# Altium PCB Timer_pcb.PcbDoc
Units mil, origin at the board's own origin, x right, y up, seen from the top; angles counter-clockwise.
Board outline 1584.83 x 1584.83 mil, 4 copper layers (Top Layer, power, Gnd, Bottom Layer), stack 23.756 mil thick; 17 components, 13 nets, 64 pads, 0 vias.
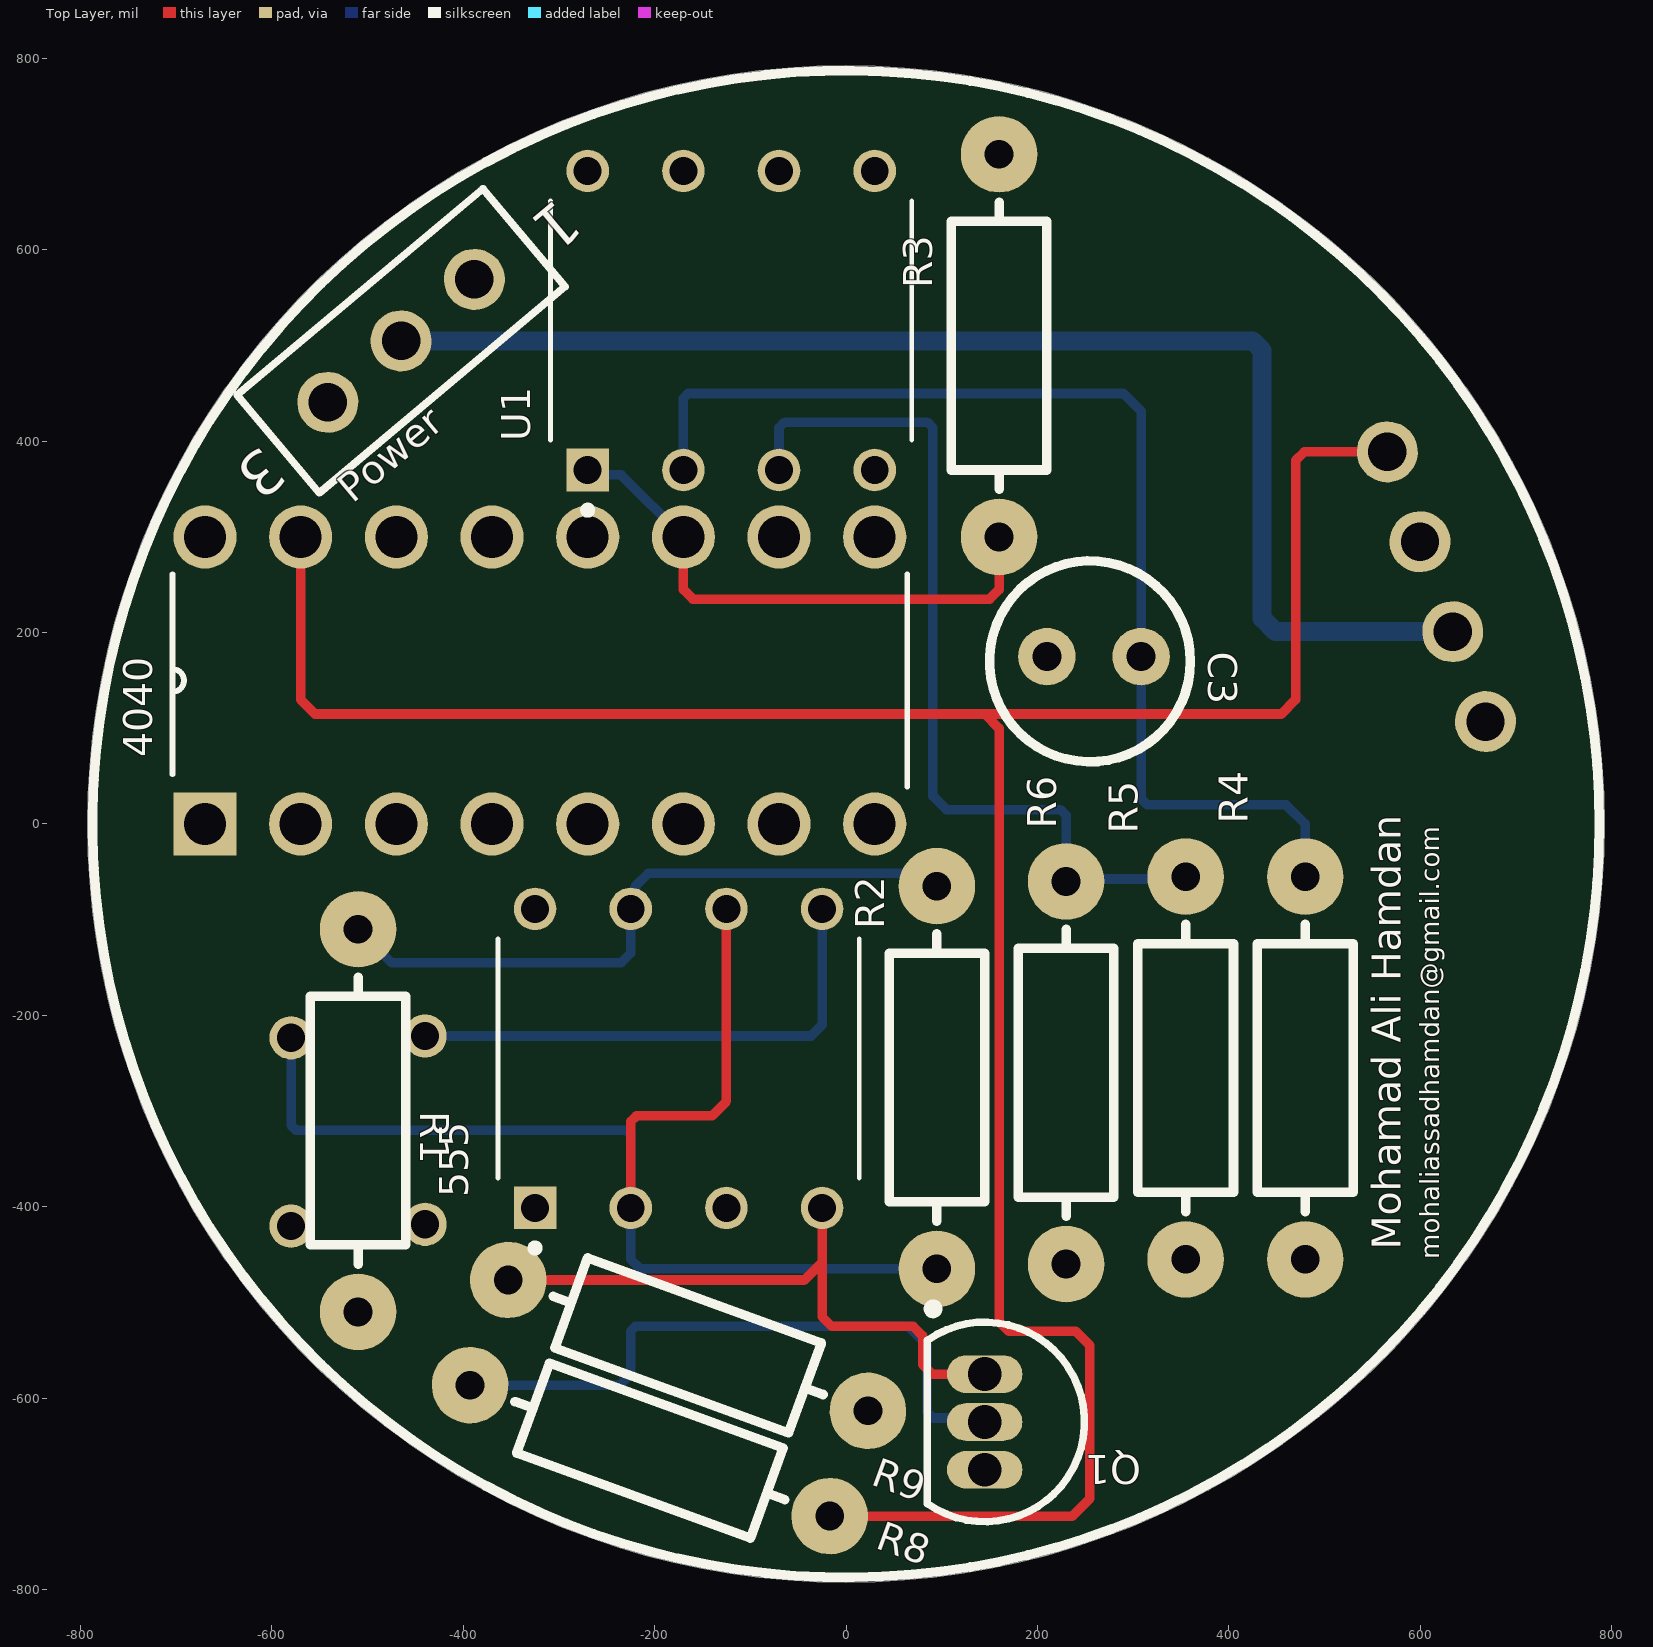
[diagram p0: Top Layer view]
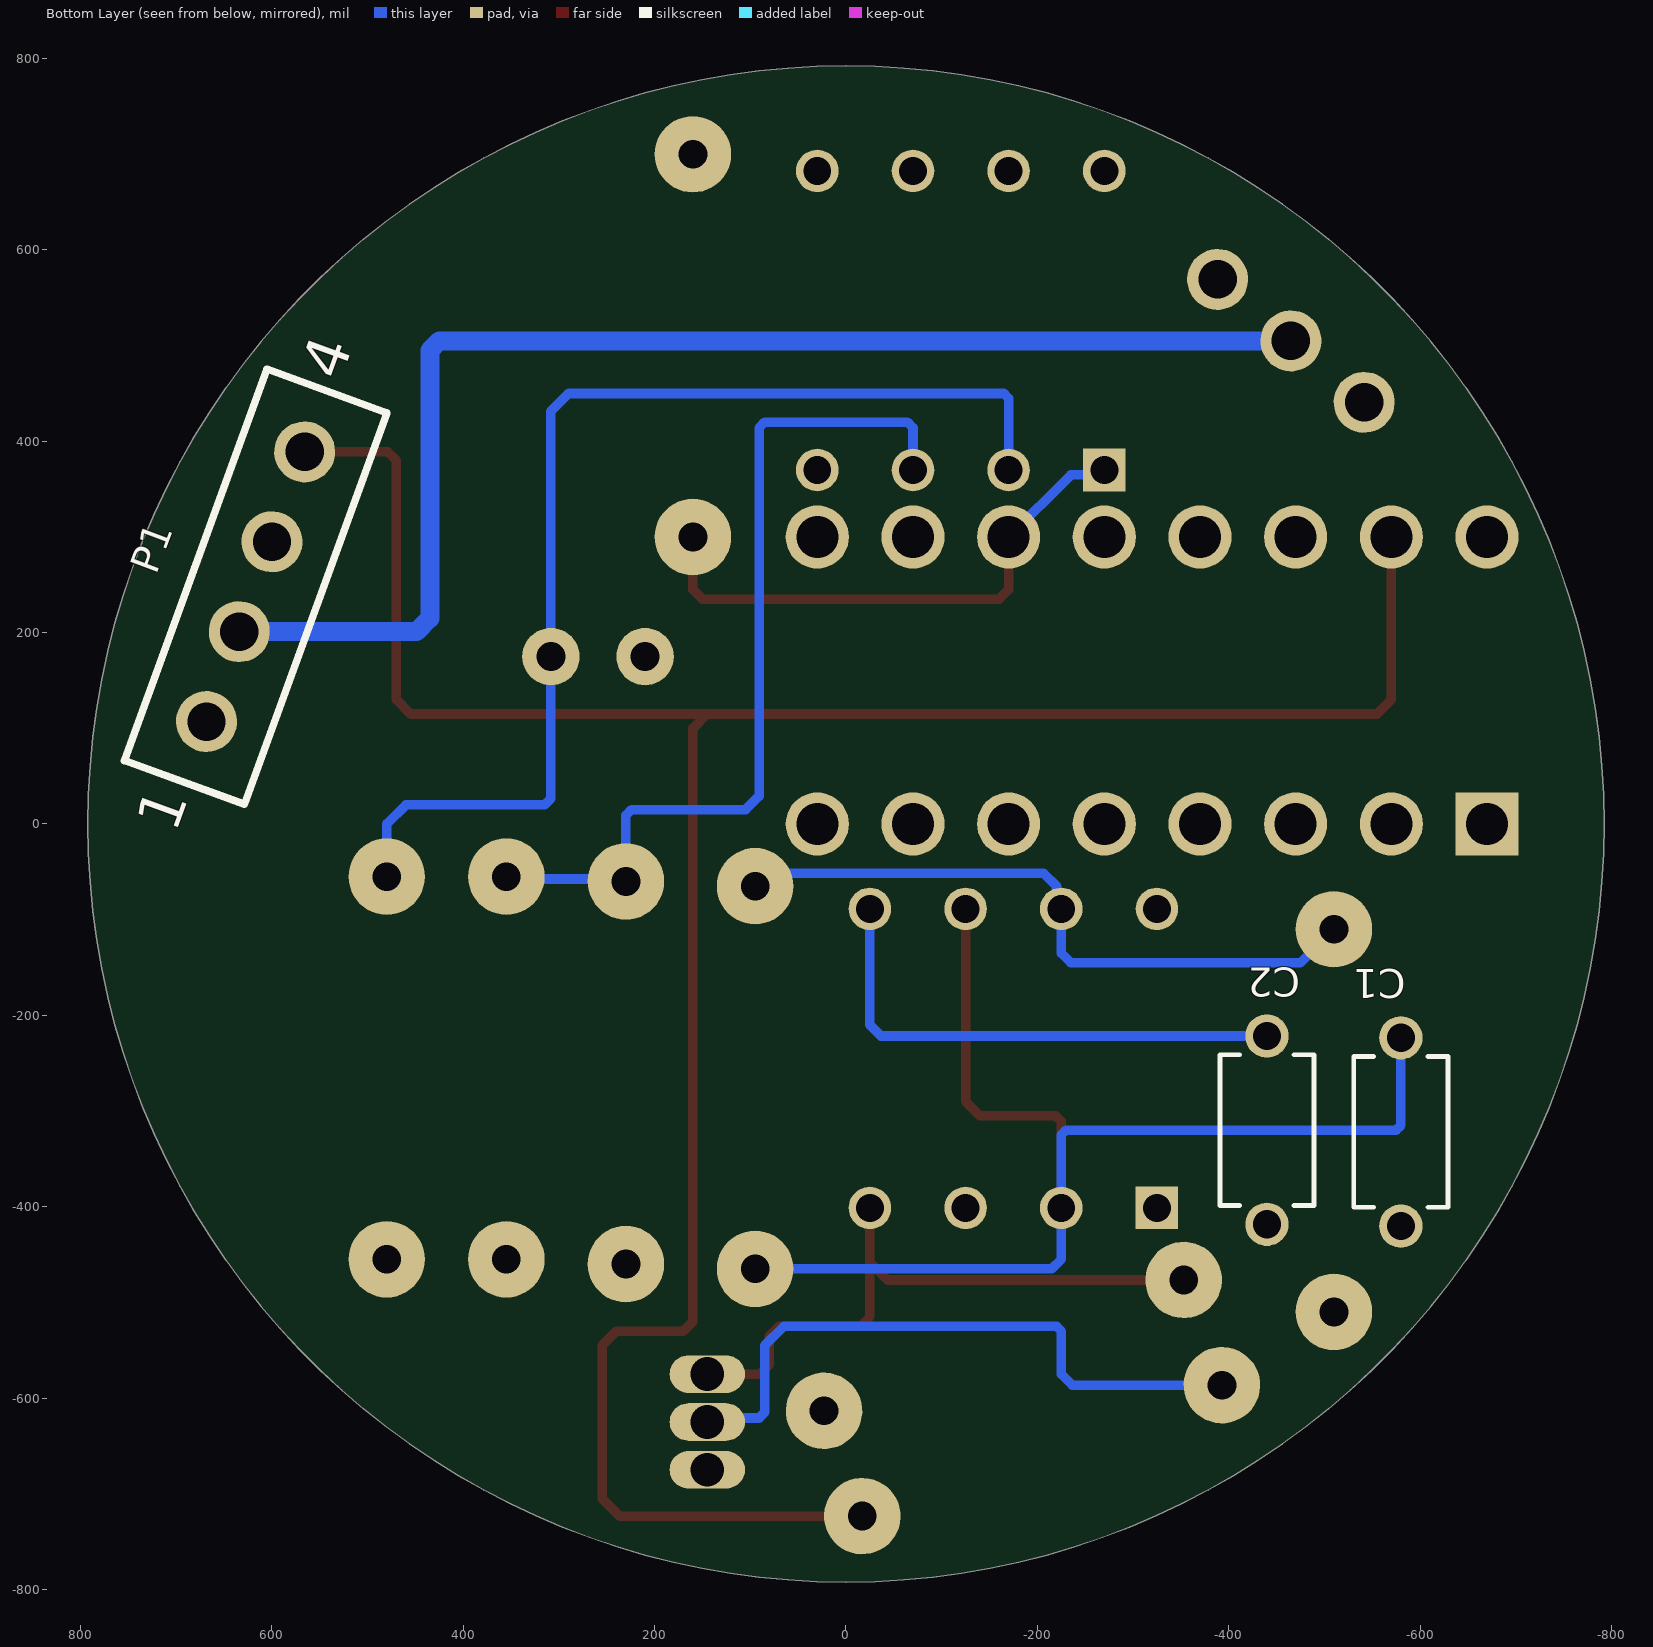
[diagram p1: Bottom Layer view, seen from below]
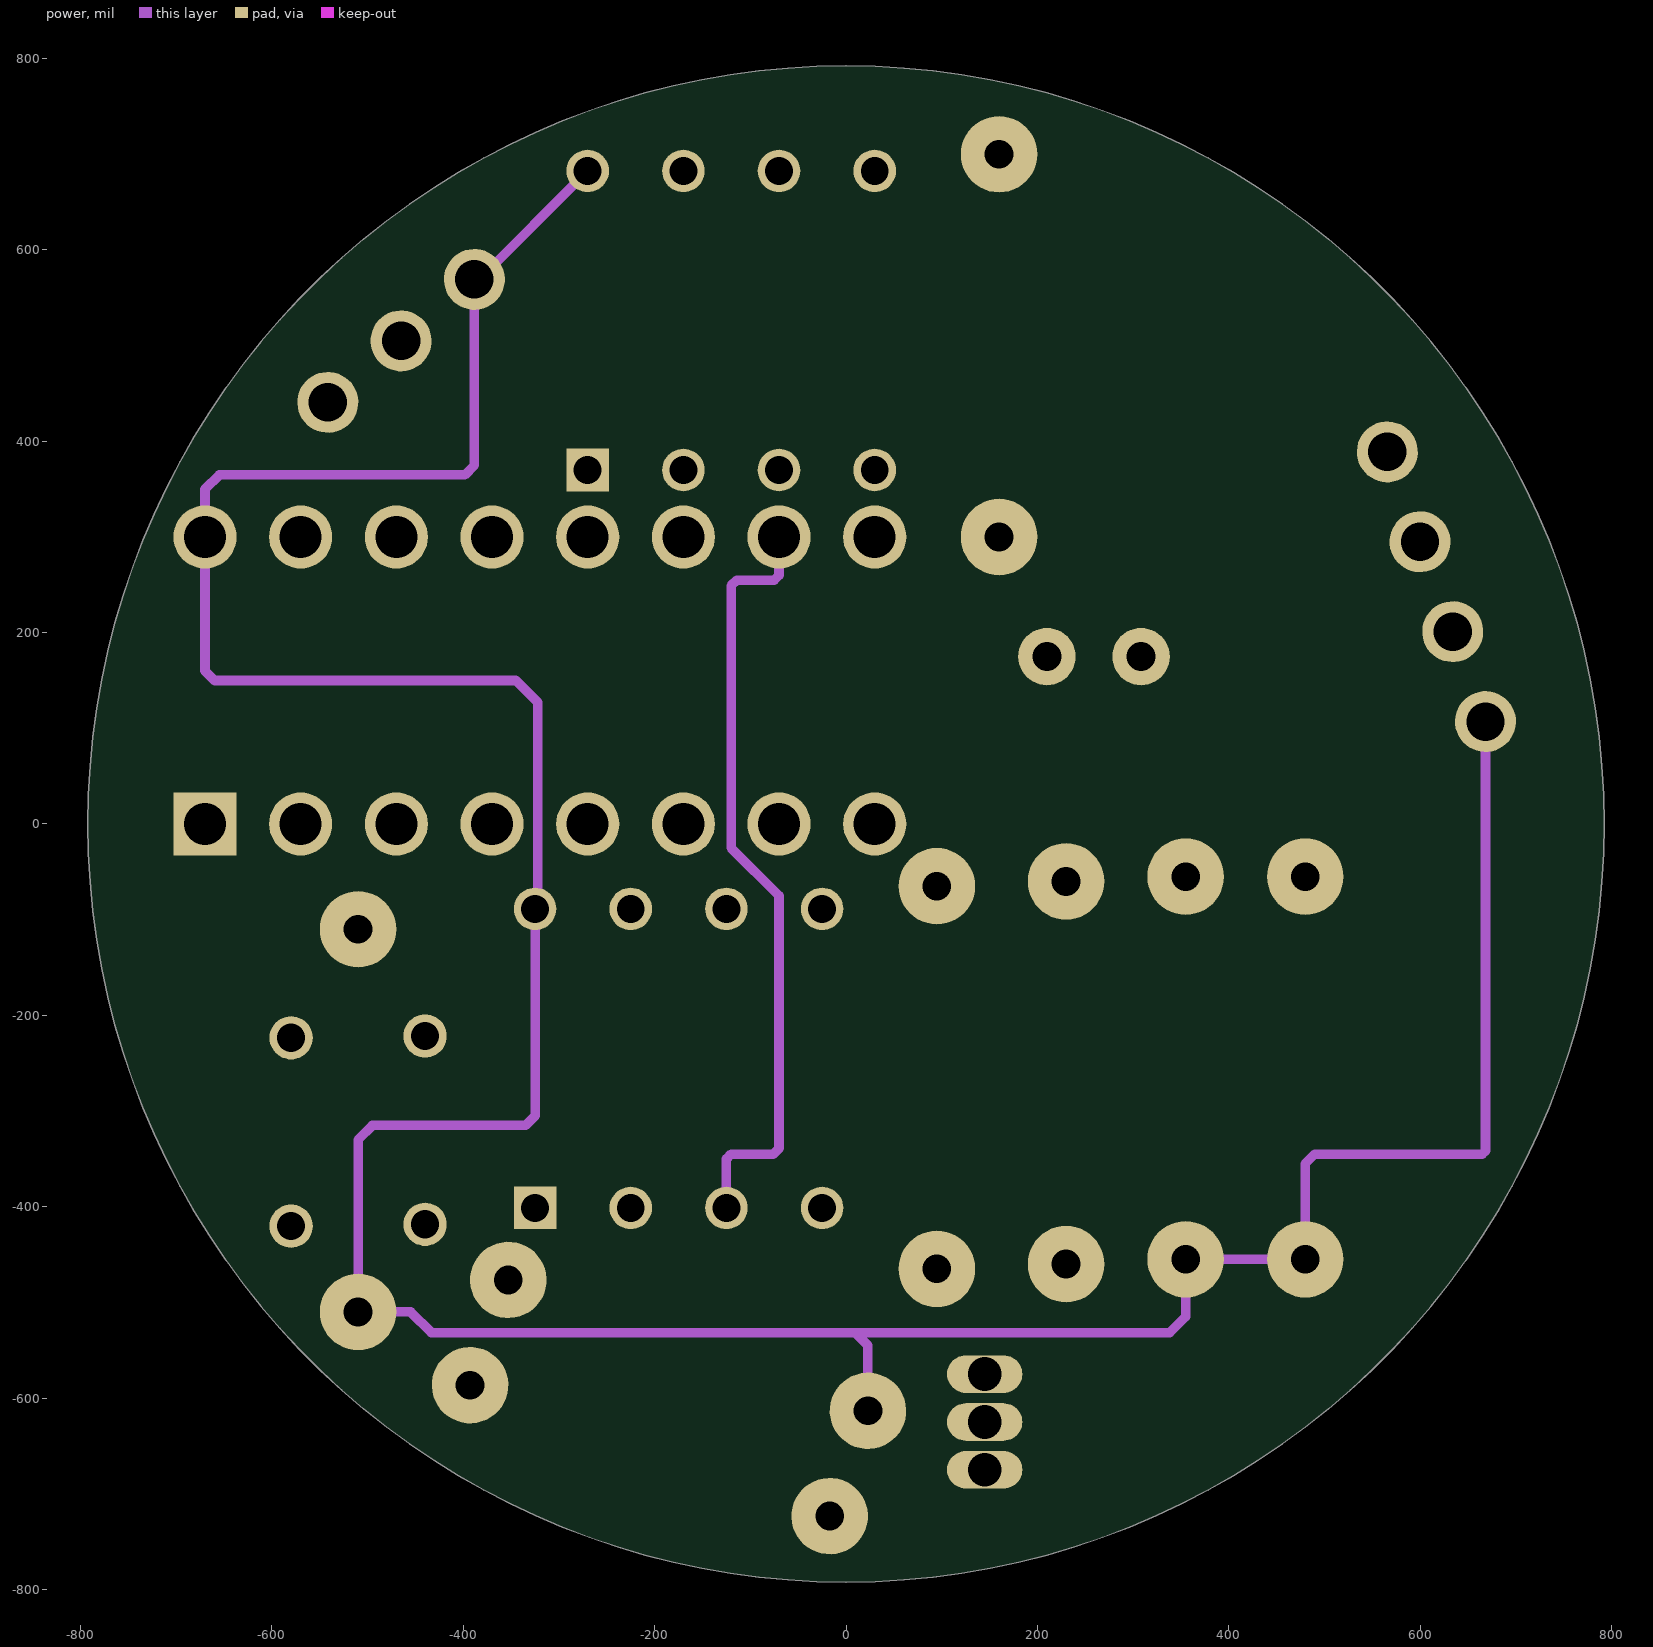
[diagram p2: power]
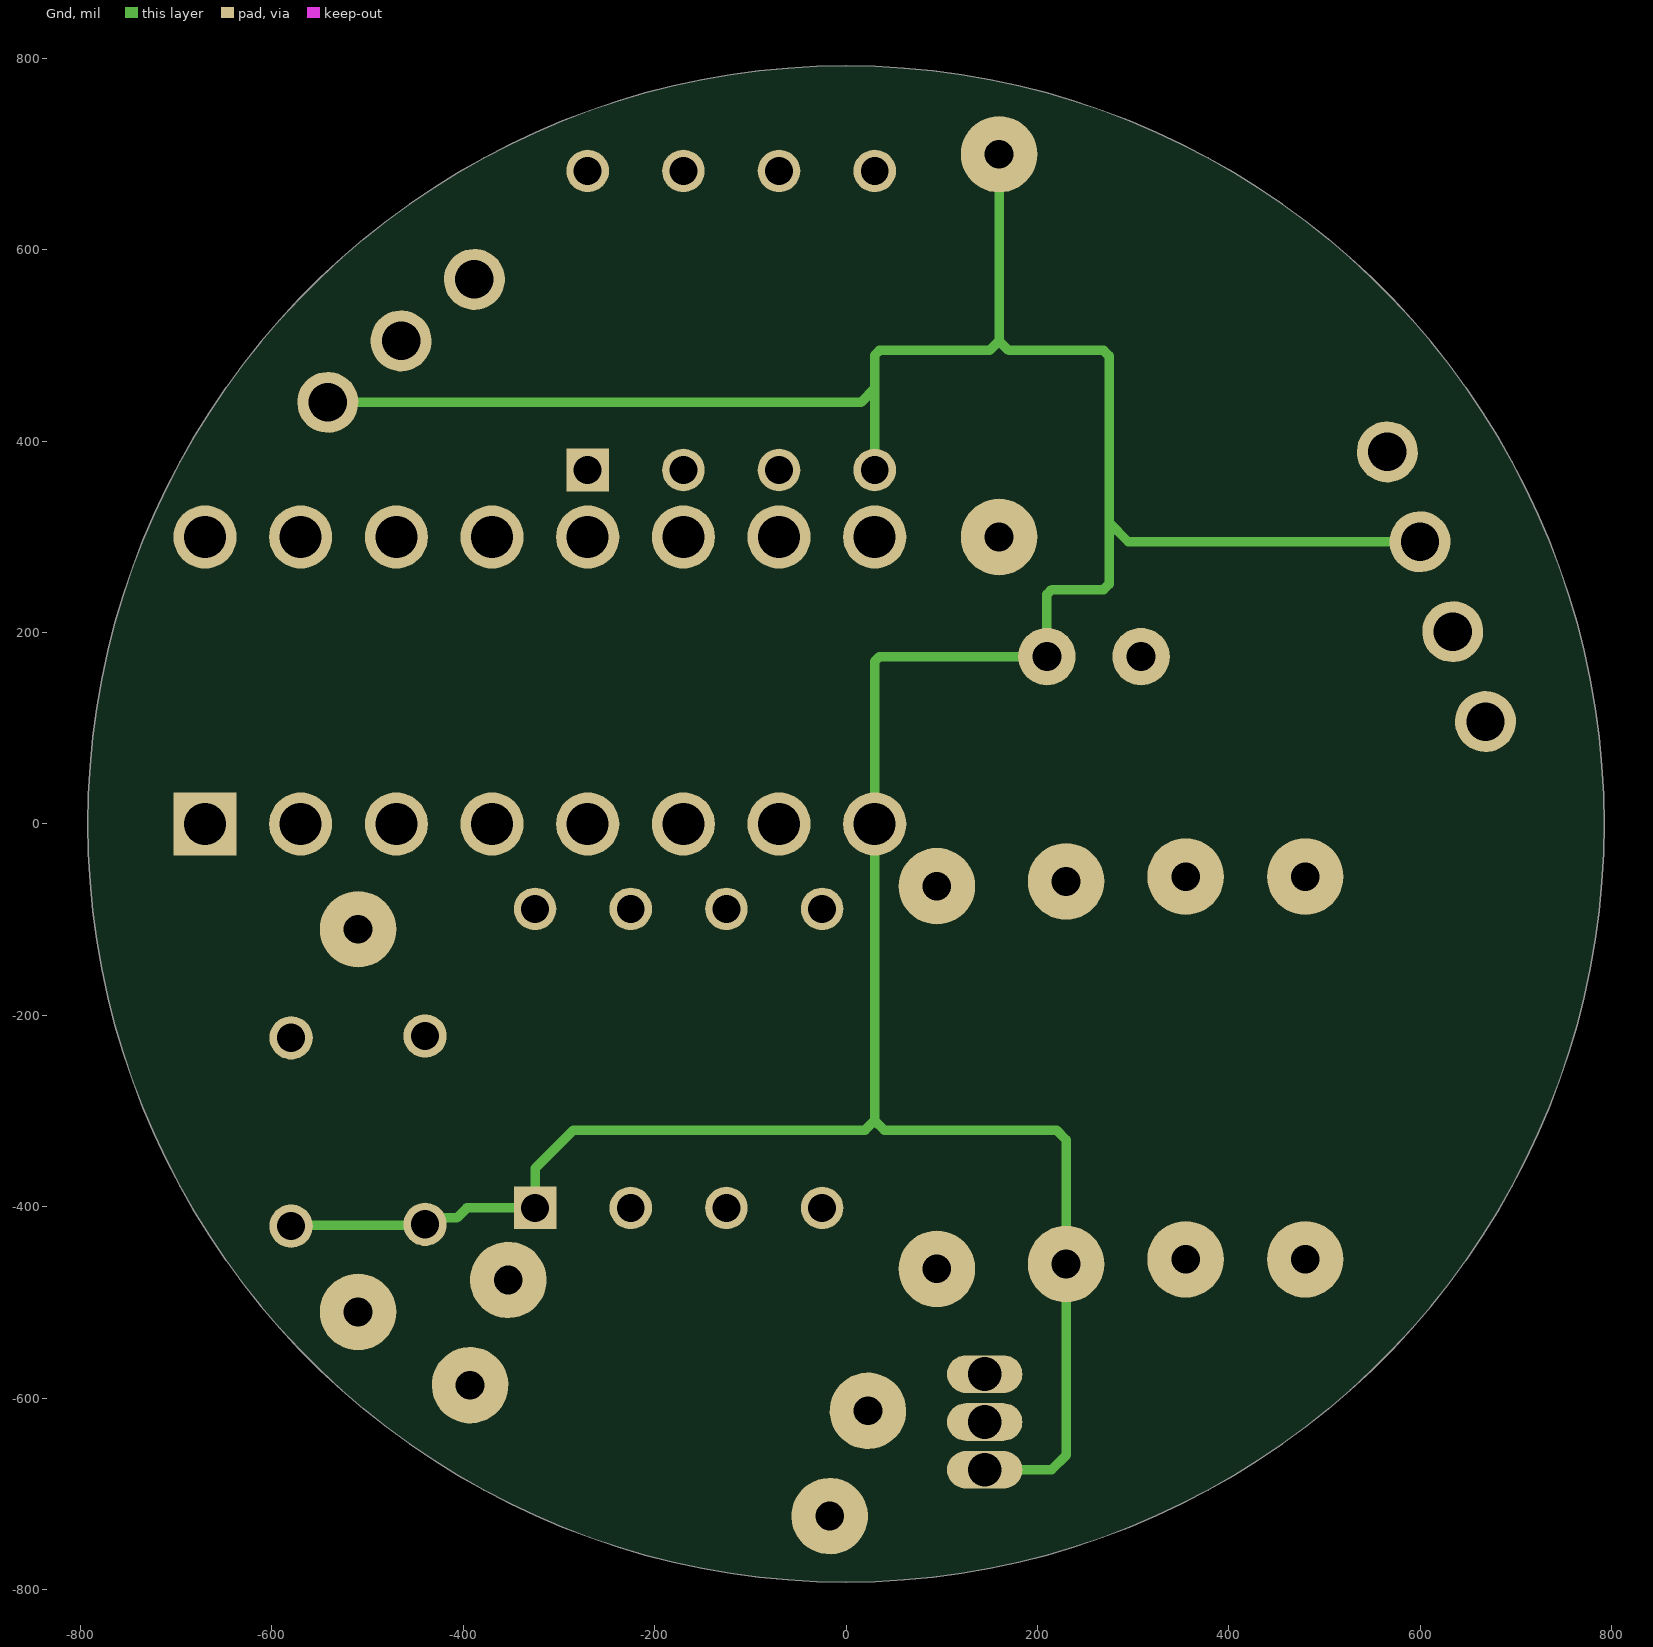
[diagram p3: Gnd]
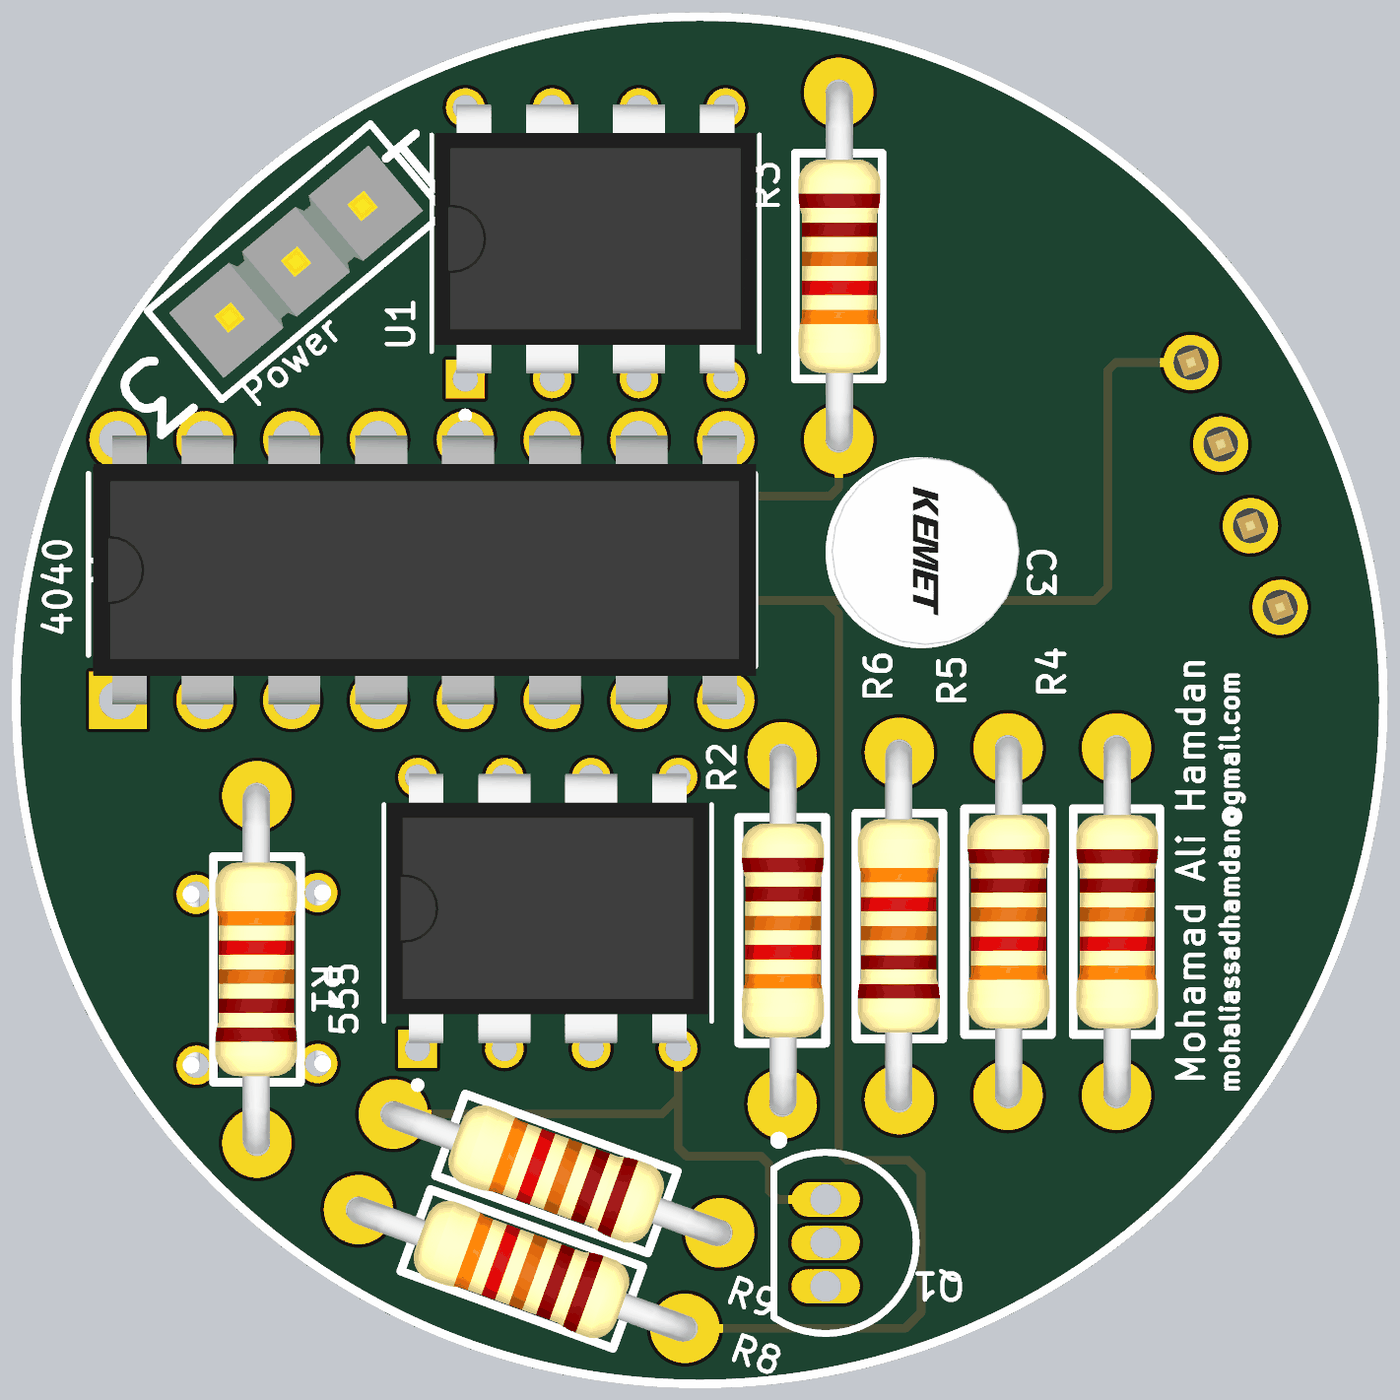
[diagram p4: 3D render of the assembled board from above, using the file's embedded part models]
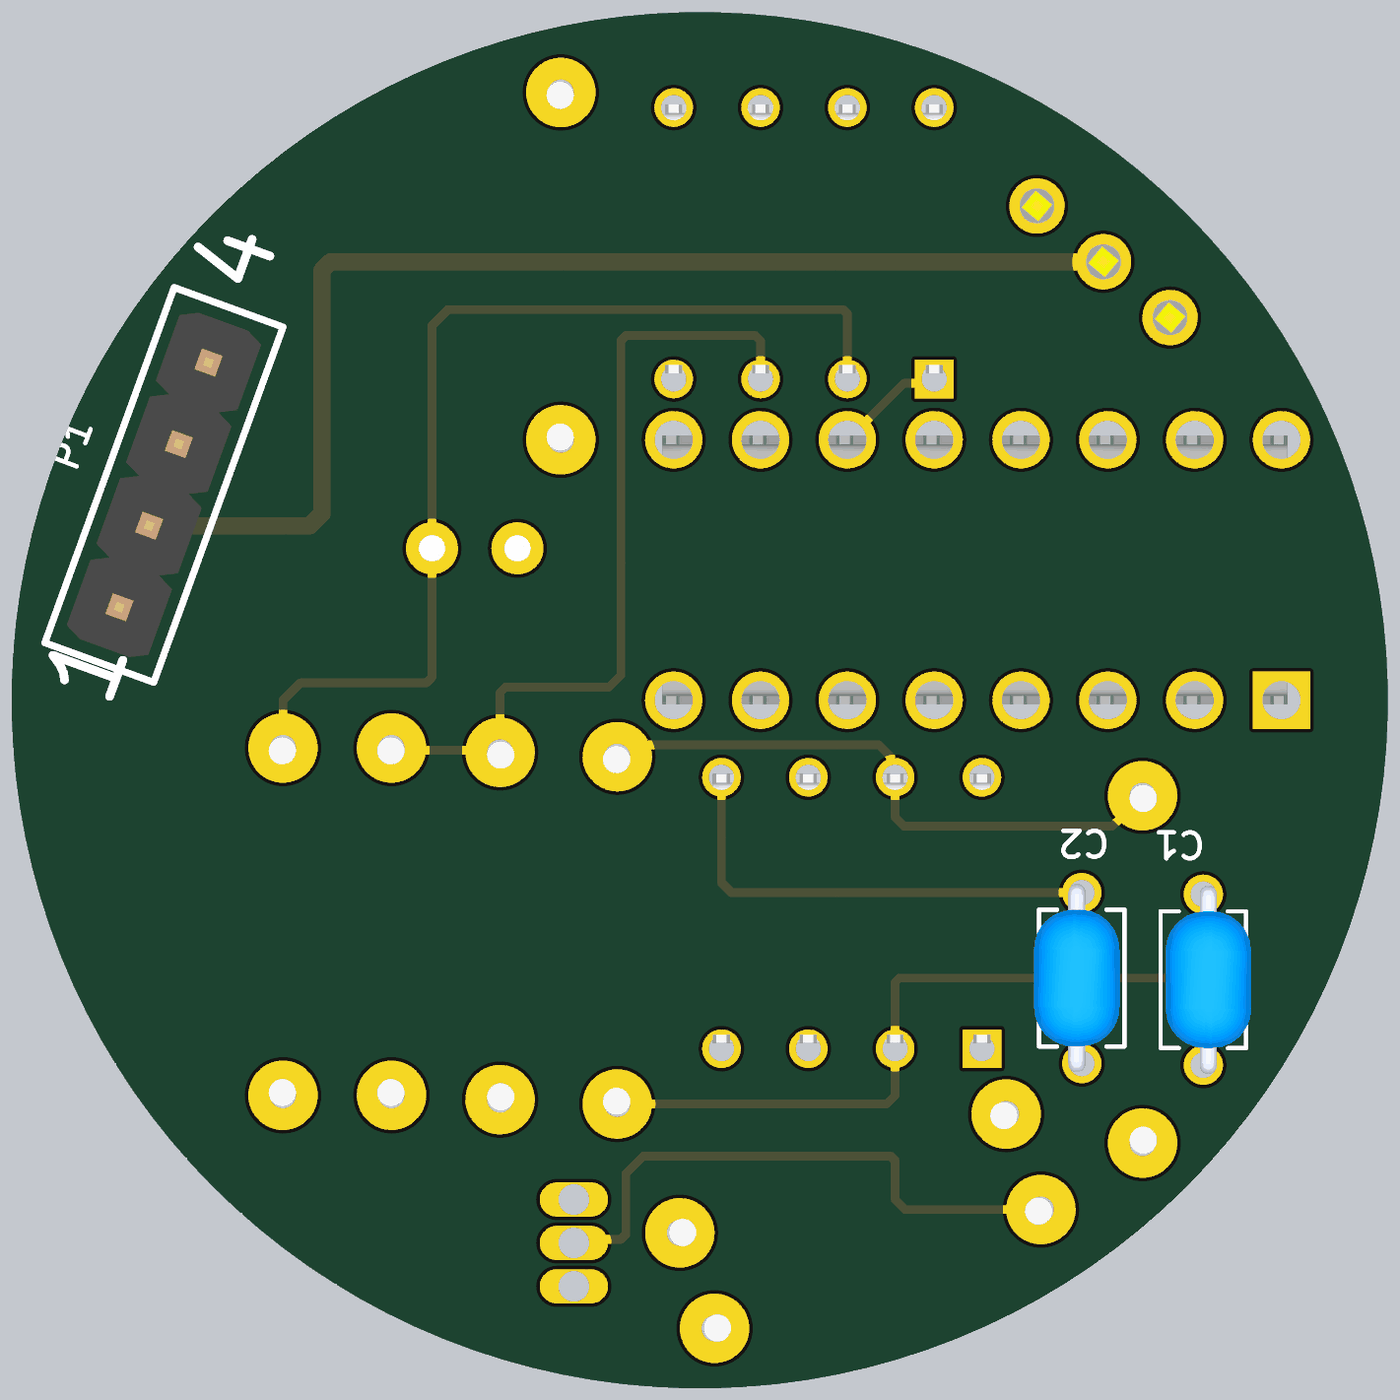
[diagram p5: 3D render of the assembled board from below, using the file's embedded part models]

## Layer stack, top to bottom
Top Solder: solder mask 0.4, Solder Resist, Dk 3.5
Top Layer: signal copper 1.4
Dielectric 2: prepreg 2.8, PP-006, Dk 4.1
power: signal copper 1.3779
Dielectric 1: dielectric 12.6, FR-4, Dk 4.8
Gnd: signal copper 1.3779
Dielectric 3: prepreg 2.8, PP-006, Dk 4.1
Bottom Layer: signal copper 1.4
Bottom Solder: solder mask 0.4, Solder Resist, Dk 3.5

## Board outline
0,-792.42 cw(c0,0) -792.42,0 cw(c0,0) 0,792.42 cw(c0,0) 792.42,0 cw(c0,0)

## Design rules (kind name [scope] priority, off if disabled: settings)
Clearance [All] p1: gap=10 ignorepadtopadclearanceinfootprint=FALSE except(0: Arc-Hole Track-Hole SMDPad-Hole THPad-Hole Via-Hole Fill-Hole Poly-Hole Region-Hole Text-Hole)
PolygonConnect [All] p1: connectstyle=Relief reliefconductorwidth=10 reliefentries=4 polygonreliefangle="90 Angle" airgapwidth=10
RoutingVias [All] p1: holewidth=28 width=50 viastyle="Through Hole" minholewidth=28 minwidth=50 maxholewidth=28 maxwidth=50
SolderMaskExpansion [All] p1: expansion=4
Width [All] p1: maxlimit=20 minlimit=10 preferedwidth=10
30 further rules are at their usual default settings.

## Components (designator, comment, footprint, x,y, rotation, side; value= is the part's Value field where it differs from the comment)
555 "LM555CN/NOPB" DIP794W45P254L959H508Q8 -175,-245 r90 top
4040 "HEF4040BP" DIP254P762X420-16 30,300 r90 top
C1 "Cap" CAP_RDER71H333K0M1H03A -580,-321.89 r270 bottom value=0.047uF
C2 "Cap" CAP_RDER71H333K0M1H03A -440,-320 r90 bottom value=10nF
C3 "Cap2" Capacitor_polarized_100uF 210,175 r0 top value=1uF
P1 "SAMTEC-HTSW-104-14-X-SJ" SAMTEC-HTSW-104-14-X-S 617.1,248.01 r110 bottom
Power "SAMTEC-HTSW-103-07-X-SJ" SAMTEC-HTSW-103-07-X-S -465,505 r220 top (schematic designator power)
Q1 "NPN" TO-226-AA 145,-625 r180 top
R1 "Res1" resistor -510,-310 r90 top value=5.6K
R2 "Res1" resistor 95,-265 r270 top value=27K
R3 "Res1" resistor 160,500 r270 top value=10K
R4 "Res1" resistor 480,-255 r270 top value=10K
R5 "Res1" resistor 355,-255 r270 top value=100K
R6 "Res1" resistor 230,-260 r90 top value=200K
R8 "Res1" resistor -205,-655 r160 top value=10K
R9 "Res1" resistor -165,-545 r160 top value=10K
U1 "LT1112CN8" DIP794W45P254L959H508Q8 -120,526.3 r90 top

## Footprints (in the part's own frame and the unit in brackets; to place one, negate y for a bottom-side part, rotate by r counter-clockwise, add the part's x,y. Pads: shape width x height; smd on the part's side, far side on the other; paste and mask are expansions set on the pad)
CAP_RDER71H333K0M1H03A [mm]
  round 1.15 hole 0.75: 1(-2.5,0) 2(2.5,0)
  silkscreen extent -2,-1.25 2,1.25, body extent -2.75,-1.1 3.68,4.32, height 7
Capacitor_polarized_100uF [mil] "Capacitor_polarized_100uF 25V"
  round 60 hole 30: +(98.43,0) -(0,0)
  silkscreen extent -60,-110 150,100, body extent -58,-112 158,105, height 591
DIP254P762X420-16 [mil]
  rect 66x66 hole 44: 1(-300,700)
  round 66 hole 44: 2(-300,600) 3(-300,500) 4(-300,400) 5(-300,300) 6(-300,200) 7(-300,100) 8(-300,0) 9(0,0) 10(0,100) 11(0,200) 12(0,300) 13(0,400) 14(0,500) 15(0,600) 16(0,700)
  silkscreen extent -261,-34 -39,734, body extent -305,-35 315,729, height 183
DIP794W45P254L959H508Q8 [mm]
  rect 1.13x1.13 hole 0.74: 1(-3.97,3.81)
  round 1.13 hole 0.74: 2(-3.97,1.27) 3(-3.97,-1.27) 4(-3.97,-3.81) 5(3.97,-3.81) 6(3.97,-1.27) 7(3.97,1.27) 8(3.97,3.81)
  silkscreen extent -5.13,-4.79 3.18,4.79, body extent -3.81,-4.7 4.06,4.7, height 5.36
resistor [mil]
  round 80 hole 30: 1(200,0) 2(-200,0)
  silkscreen extent -150,-50 150,50, body extent -213,-46 213,48, height 91
SAMTEC-HTSW-103-07-X-S [mm]
  round 1.62 hole 1.02: 1(-2.54,0) 2(0,0) 3(2.54,0)
  silkscreen extent -4.26,-1.69 4.26,1.69, body extent -3.81,-1.24 3.81,1.24, height 8.38
SAMTEC-HTSW-104-14-X-S [mm]
  round 1.62 hole 1.02: 1(-3.81,0) 2(-1.27,0) 3(1.27,0) 4(3.81,0)
  silkscreen extent -5.53,-1.69 5.53,1.69, body extent -5.08,-1.27 5.08,1.27, height 8.77
TO-226-AA [mm] "TO, Flat Index; 3 In-Line, Axial Leads; Body Dia. 4.8mm; Leads 0.55 x 0.51 mm (max)"
  oval 2x1 hole 0.9: 1(0,-1.27) 2(0,0) 3(0,1.27)
  silkscreen extent -2.65,-3.13 1.52,2.65, body extent -2.65,-2.66 1.52,2.66, height 5.33

## Part data
555: Package=None, Availability=Unavailable, MP=LM555CN/NOPB, Price=None
4040: "Counter IC Binary Counter 1 Element 12 Bit Negative Edge 16-DIP", Package="PDIP-16 NXP Semiconductors", Availability=Bad, Check_prices=https://www.snapeda.com/parts/HEF4040BP/NXP%20USA%20Inc./view-part/568595/?ref=eda, MF="NXP USA", MP=HEF4040BP, Price=None, SnapEDA_Link=https://www.snapeda.com/parts/HEF4040BP/NXP%20USA%20Inc./view-part/568595/?ref=snap
C1 C2 C3: "Capacitor", Publisher="Altium Limited"
  C1 C2: LatestRevisionDate=17-Jul-2002, LatestRevisionNote="Re-released for DXP Platform.", PackageDescription="Radial Cap, Thru-Hole; 2 Leads; 0.3 in Pin Spacing", PackageReference=RAD-0.3, Published=8-Jun-2000
  C3: PackageDescription="Capacitor; 2 Leads", PackageReference=CAPR5-4X5, Published=23-Sep-2002
Q1: "NPN Bipolar Transistor", Code_JEDEC=TO-226-AA, LatestRevisionDate=17-Jul-2002, LatestRevisionNote="Re-released for DXP Platform.", PackageDescription="TO, Flat Index; 3 In-Line, Axial Leads; Body Dia. 4.8mm; Leads 0.55 x 0.51 mm (max)", PackageReference=TO-226-AA, Published=8-Jun-2000, Publisher="Altium Limited"
R1 R2 R3 R4 R5 R6 R8 R9: "Resistor", LatestRevisionDate=17-Jul-2002, LatestRevisionNote="Re-released for DXP Platform.", PackageDescription="Axial Device, Thru-Hole; 2 Leads; 0.3 in Pin Spacing", PackageReference=AXIAL-0.3, Published=8-Jun-2000, Publisher="Altium Limited"
U1: "Dual Low Power Precision, Picoamp Input Operational Amplifier", ComponentLink1Description="Manufacturer Link", ComponentLink1URL=http://www.linear.com/, ComponentLink2Description=Datasheet, ComponentLink2URL=http://www.linear.com/pc/downloadDocument.do?navId=H0,C1,C1154,C1009,C1100,P1365,D1714, DatasheetVersion=1996, LatestRevisionDate=29-May-2009, LatestRevisionNote="Component Body Added.", Note=453, PackageDescription="DIP, Plastic, 8-Pin, Row Spacing 7.62 mm, Pitch 2.54 mm", PackageReference=N8, PackageVersion="N8 1002", Published=8-Jun-2000, Publisher="Altium Limited"

## Nets (pads, with @x,y where several pads share a name; then routed paths per layer and width w, separated by ;. In a path a pad name is that pad's centre, name@x,y a point inside that pad or via, vN(x,y) a via of type N, cw(c..) or ccw(c..) an arc to the next point about the centre after c; other vN are vias at no path point)
+5V: 555.8 4040.16 P1.1 Power.1 R1.2 R4.1 R5.1 R9.2 U1.8 | length 3907.6
  power w10: U1.8 -383.32,569.28 Power.1 -388.4,375 -398.4,365 -655,365 -670,350 4040.16 -670,160 -660,150 -345,150 -322,127 -322,-85.7 555.8 -325,-305 -335,-315 -495,-315 -510,-330 R1.2 -455,-510 -433.4,-531.6 9.53,-531.6 ; R9.2 22.94,-545 9.53,-531.6 ; P1.1 668.4,-341.6 665,-345 490,-345 480,-355 R4.1 R5.1 355,-515 338.4,-531.6 9.53,-531.6
After_One_sec_ON: 4040.15 P1.4 R8.2 | length 2758.2
  Top Layer w10: 4040.15 -570,130 -555,115 145,115 ; R8.2 236.6,-723.4 255,-705 255,-545 240,-530 170,-530 160,-520 160,100 145,115 ; P1.4 478.97,388.97 470,380 470,130 455,115 145,115
GND: 555.1 4040.8 C1.2 C2.1 C3.- P1.3 Power.3 Q1.3 R3.2 R6.2 U1.4 | length 3827.8
  Gnd w10: C1.2 -579.06,-419.37 -440.94,-419.37 C2.1 -433.25,-411.68 -406.68,-411.68 -396.3,-401.3 555.1 -325,-360 -285,-320 20,-320 30,-310 ; Power.3 15.72,440.72 30,455 ; U1.4 30,455 ; Q1.3 215,-675 230,-660 R6.2 230,-330 220,-320 40,-320 30,-310 ; R3.2 160,505 ; P1.3 305,295 295,295 275,315 ; 30,-310 4040.8 30,170 35,175 C3.- 210,240 215,245 269.14,245 275,250.86 275,315 ; 30,455 30,490 35,495 150,495 160,505 ; 160,505 170,495 269.14,495 275,489.14 275,315
Net555_2: 555.2 555.6 C1.1 R2.1 | length 1305.2
  Top Layer w10: 555.2 -225,-310.86 -219.14,-305 -140,-305 -125,-290 555.6
  Bottom Layer w10: C1.1 -580,-315 -575,-320 -230,-320 -225,-325 555.2 -225,-455 -215,-465 R2.1
Net555_3: 555.3 4040.10 | length 814.3
  power w10: 555.3 -125,-350 -120,-345 -75.86,-345 -70,-339.14 -70,-75 -120,-25 -120,249.14 -114.14,255 -75,255 -70,260 4040.10
Net555_4: 555.4 Q1.1 R9.1 | length 661.7
  Top Layer w10: R9.1 -43.45,-476.6 -25,-458.15 ; 555.4 -25,-458.15 ; Q1.1 90,-575 80,-565 80,-535 70,-525 -15,-525 -25,-515 -25,-458.15
Net555_5: 555.5 C2.2 | length 541.1
  Bottom Layer w10: C2.2 -36.57,-221.57 -25,-210 555.5
Net555_7: 555.7 R1.1 R2.2 | length 701.9
  Bottom Layer w10: R1.1 -475,-145 -235,-145 -225,-135 555.7 -220,-83.7 -220,-65 -206.46,-51.46 81.46,-51.46 R2.2
Net4040_11: 4040.11 R3.1 U1.1 | length 577.3
  Top Layer w10: 4040.11 -170,245 -160,235 150,235 160,245 R3.1
  Bottom Layer w10: U1.1 -265,365 -235,365 4040.11
NetC3_1: C3.+ R4.2 U1.2 | length 1205.7
  Bottom Layer w10: U1.2 -170,445 -165,450 290,450 308.43,431.57 C3.+ 308.43,26.57 315,20 460,20 480,0 R4.2
NetQ1_2: Q1.2 R8.1 | length 672.2
  Bottom Layer w10: R8.1 -236.6,-586.6 -225,-575 -225,-530 -220,-525 65,-525 85,-545 85,-615 90.86,-620.86 140.86,-620.86 Q1.2
NetR5_2: R5.2 R6.1 U1.3 | length 938.5
  Bottom Layer w10: U1.3 -70,414.14 -64.14,420 85,420 90.86,414.14 90.86,29.14 105,15 224.14,15 230,9.14 R6.1 232.5,-57.5 352.5,-57.5 R5.2
Vturbine: P1.2 Power.2 | length 1389.1
  Bottom Layer w20: Power.2 425,505 435,495 435,215 448.97,201.03 P1.2
pads on no net: 4040.1 4040.2 4040.3 4040.4 4040.5 4040.6 4040.7 4040.9 4040.12 4040.13 4040.14 U1.5 U1.6 U1.7

## Silkscreen, mask and mechanical layers (free items; w line width, h text height)
Top Overlay:
  circle w10: c0,0 r787.4
  text "Mohamad Ali Hamdan" at 580,-445 h30 r90
  text "mohaliassadhamdan@gmail.com" at 620,-455 h20 r90

## Text inside footprints (layer, text, board x,y; h text height)
P1: Mechanical 40 "7.620" at 724.65,259.51 h15.5 r290; Mechanical 40 "10.160" at 512.97,176.59 h15.5 r290; Mechanical 40 "2.540" at 780.48,40.39 h15.5 r290; Mechanical 40 "2.489" at 753.65,-141.78 h15.5 r290; Mechanical 16 "4" at 514.55,456.66 h77.5 r290; Mechanical 16 "1" at 686.52,-15.8 h77.5 r290; Bottom Overlay "4" at 514.55,456.66 h77.5 r290; Bottom Overlay "1" at 686.52,-15.8 h77.5 r290
Power: Top Overlay "1" at -311.28,666.62 h77.5 r220; Top Overlay "3" at -619.83,407.72 h77.5 r220; Mechanical 40 "2.489" at -190.15,742.16 h15.5 r220; Mechanical 40 "2.540" at -258,570.97 h15.5 r220; Mechanical 40 "5.080" at -241.62,555.37 h15.5 r220; Mechanical 40 "7.620" at -523.7,615.37 h15.5 r220; Mechanical 16 "1" at -311.28,666.62 h77.5 r220; Mechanical 16 "3" at -619.83,407.72 h77.5 r220